# EAGLE board test_out (EAGLE 7.4.0)
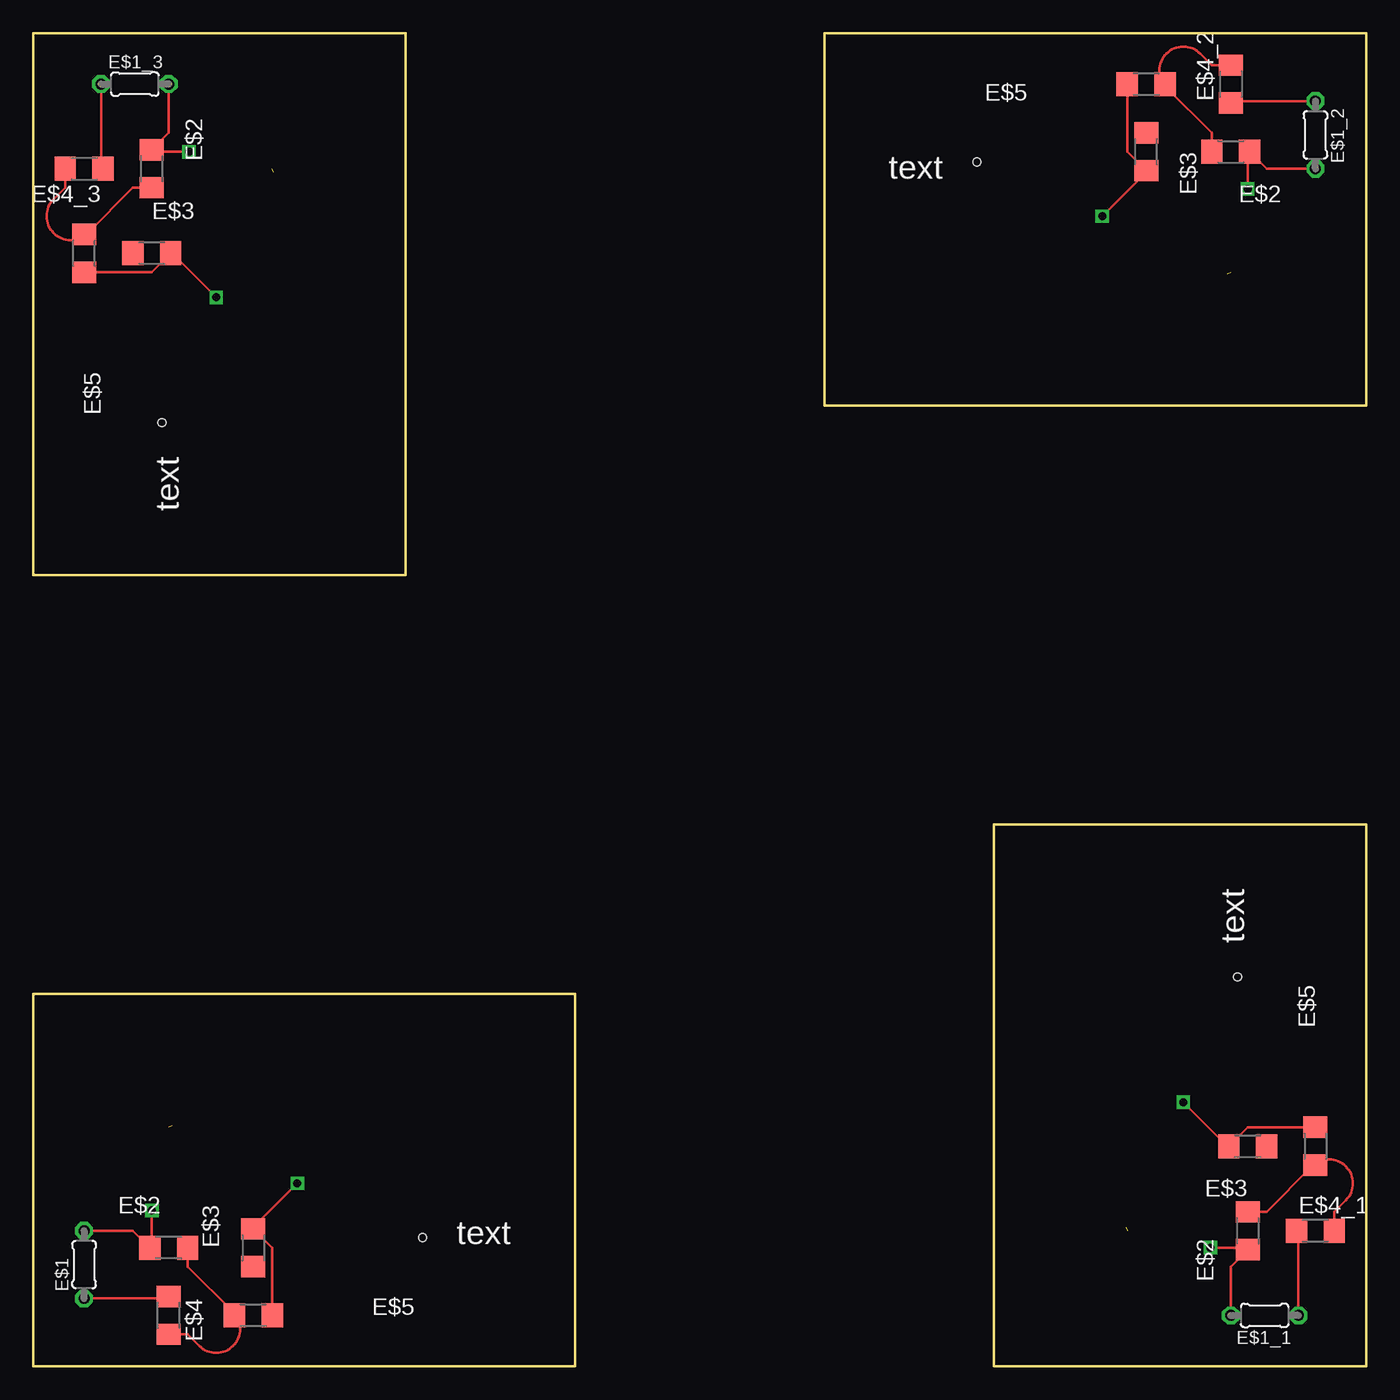
[diagram p0: board, top side]
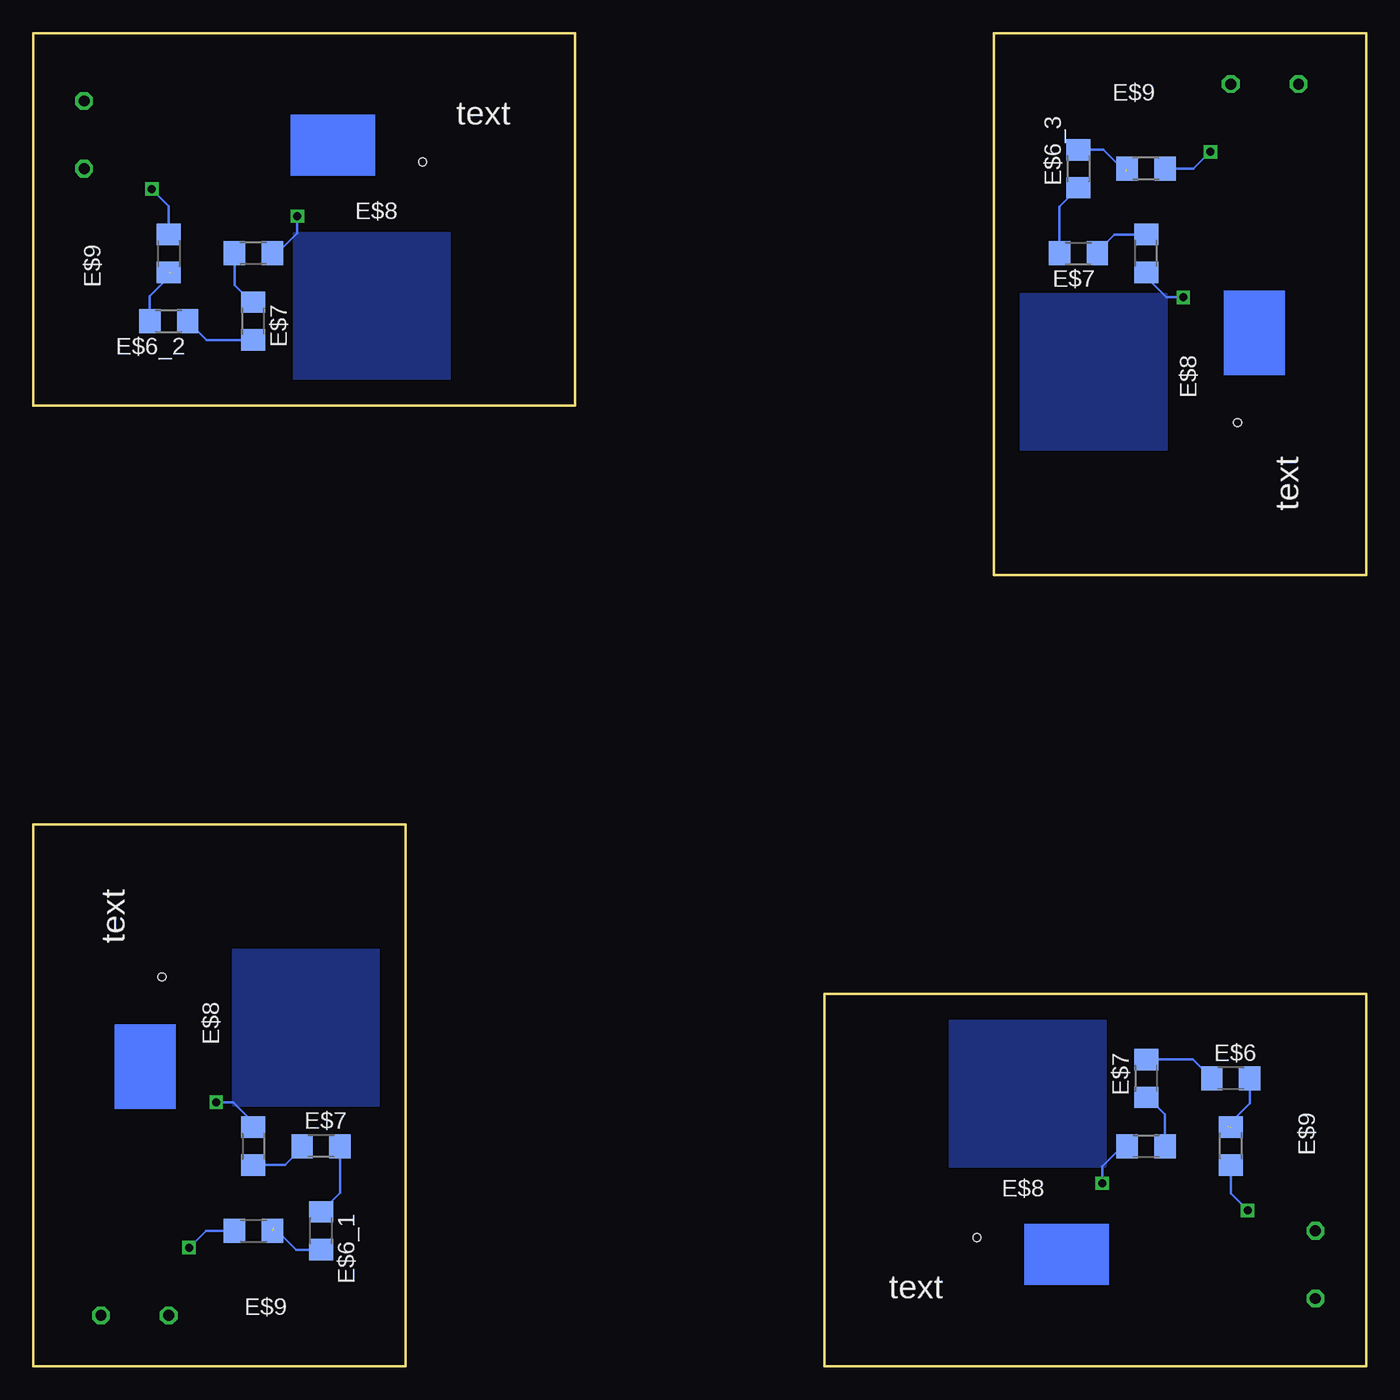
[diagram p1: board, bottom side, seen from below]

Size 100 x 100 mm. Coordinates in mm from the lower left corner, seen from the top.
Outline: 0,0 0,27.94 40.64,27.94 40.64,0 0,0
Outline: 100,0 72.06,0 72.06,40.64 100,40.64 100,0
Outline: 100,100 100,72.06 59.36,72.06 59.36,100 100,100
Outline: 0,100 27.94,100 27.94,59.36 0,59.36 0,100
Copper layers (1*16): Top 0.035mm / dielectric 1.5mm / Bottom 0.035mm
Design rules "default": minimum track width 10mil, minimum drill 24mil, track to track 8mil, track to pad 8mil, pad to pad 8mil, via to via 8mil, smd to smd 8mil, copper to edge 40mil, drill to drill 8mil, minimum pad ring 10mil, minimum via ring 8mil, stop-mask expansion 4mil, vias tented up to drill 0mil, thermal gap 10mil
Holes 0.6 mm at 29.21,9.65 90.35,29.21 70.79,90.35 9.65,70.79

## Footprints (pad centres in the part's own frame; a part is rotated, then mirrored left to right if it is on the bottom)
0204/5 = drill 0.813 octagon: 1 -2.54,0; 2 2.54,0
R1206 = smd 1.6 x 1.803: 1 -1.422,0; 2 1.422,0

## Placement (x,y rotation side)
E$1  [0204/5]  3.81,7.62 90 top
E$1_1  [0204/5]  92.38,3.81 180 top
E$1_2  [0204/5]  96.19,92.38 270 top
E$1_3  [0204/5]  7.62,96.19 0 top
E$2  [R1206]  10.16,8.89 0 top
E$2_1  [R1206]  91.11,10.16 90 top
E$2_2  [R1206]  89.84,91.11 180 top
E$2_3  [R1206]  8.89,89.84 270 top
E$3  [R1206]  16.51,8.89 90 top
E$3_1  [R1206]  91.11,16.51 180 top
E$3_2  [R1206]  83.49,91.11 270 top
E$3_3  [R1206]  8.89,83.49 0 top
E$4  [R1206]  10.16,3.81 270 top
E$4_1  [R1206]  96.19,10.16 0 top
E$4_2  [R1206]  89.84,96.19 90 top
E$4_3  [R1206]  3.81,89.84 180 top
E$5  [R1206]  16.51,3.81 0 top
E$5_1  [R1206]  96.19,16.51 90 top
E$5_2  [R1206]  83.49,96.19 180 top
E$5_3  [R1206]  3.81,83.49 270 top
E$6  [R1206]  10.16,21.59 0 bottom
E$6_1  [R1206]  78.41,10.16 270 bottom
E$6_2  [R1206]  89.84,78.41 180 bottom
E$6_3  [R1206]  21.59,89.84 90 bottom
E$7  [R1206]  16.51,21.59 90 bottom
E$7_1  [R1206]  78.41,16.51 0 bottom
E$7_2  [R1206]  83.49,78.41 270 bottom
E$7_3  [R1206]  21.59,83.49 180 bottom
E$8  [R1206]  16.51,16.51 180 bottom
E$8_1  [R1206]  83.49,16.51 90 bottom
E$8_2  [R1206]  83.49,83.49 0 bottom
E$8_3  [R1206]  16.51,83.49 270 bottom
E$9  [R1206]  10.16,16.51 270 bottom
E$9_1  [R1206]  83.49,10.16 180 bottom
E$9_2  [R1206]  89.84,83.49 90 bottom
E$9_3  [R1206]  16.51,89.84 0 bottom

## Library data of the parts
E$1 E$1_1-E$1_3 E$2-E$4 E$4_1-E$4_3 E$5 E$6 E$6_1-E$6_3 E$7-E$9 = rcl
E$2_1-E$2_3 = rcl; NAME1: E$2
E$3_1-E$3_3 = rcl; NAME1: E$3
E$5_1-E$5_3 = rcl; NAME1: E$5
E$7_1-E$7_3 = rcl; NAME1: E$7
E$8_1-E$8_3 = rcl; NAME1: E$8
E$9_1-E$9_3 = rcl; NAME1: E$9

## Nets
S$1: E$1.1 E$4.1
S$2: E$2.2 E$4.2 E$5.1
S$3: E$3.2 E$5.2 E$8.2
S$4: E$7.1 E$8.1
S$5: E$6.1 E$7.2
S$6: E$6.2 E$9.1
S$7: E$1.2 E$2.1 E$9.2
S$11: E$1_1.1 E$4_1.1
S$12: E$1_2.1 E$4_2.1
S$13: E$1_3.1 E$4_3.1
S$21: E$2_1.2 E$4_1.2 E$5_1.1
S$22: E$2_2.2 E$4_2.2 E$5_2.1
S$23: E$2_3.2 E$4_3.2 E$5_3.1
S$31: E$3_1.2 E$5_1.2 E$8_1.2
S$32: E$3_2.2 E$5_2.2 E$8_2.2
S$33: E$3_3.2 E$5_3.2 E$8_3.2
S$41: E$7_1.1 E$8_1.1
S$42: E$7_2.1 E$8_2.1
S$43: E$7_3.1 E$8_3.1
S$51: E$6_1.1 E$7_1.2
S$52: E$6_2.1 E$7_2.2
S$53: E$6_3.1 E$7_3.2
S$61: E$6_1.2 E$9_1.1
S$62: E$6_2.2 E$9_2.1
S$63: E$6_3.2 E$9_3.1
S$71: E$1_1.2 E$2_1.1 E$9_1.2
S$72: E$1_2.2 E$2_2.1 E$9_2.2
S$73: E$1_3.2 E$2_3.1 E$9_3.2

## Tracks (layer width: path | path; a pad name or v marks a point on that pad's centre or on a via)
S$1
  Top 0.203: E$1.1 9.65,5.08 9.91,5.33 10.06,5.33 E$4.1
S$2
  Top 0.203: E$4.2 11.58,2.39 12.45,1.52 arc180 14.99,4.06 | 14.99,4.06 arc314 E$5.1 | E$2.2 11.58,7.47 14.99,4.06
S$3  (via drill 0.6)
  Top 0.203: E$5.2 17.93,8.89 E$3.2 16.51,10.41 v19.81,13.72
  Bottom 0.203: v19.81,13.72 19.81,14.99 18.03,16.76 18.03,16.61 E$8.2
  pour Bottom: 19.56,14.99 31.24,14.99 31.24,25.91 19.56,25.91
S$4
  Bottom 0.203: E$8.1 15.09,18.9 16.51,20.32 | 16.51,20.32 16.76,20.32 16.51,20.07 E$7.1 16.51,20.32
S$5
  Bottom 0.203: E$7.2 13,23.01 E$6.1
S$6  (1 unrouted)
  Bottom 0.203: E$6.2 8.74,19.71 10.41,18.03
S$7  (via drill 0.6)
  Top 0.203: v8.89,11.68 8.89,8.74 | 8.89,8.64 8.89,8.74 | 8.89,8.74 E$2.1 7.47,10.16 E$1.2
  Bottom 0.203: E$9.2 10.16,12.95 v8.89,11.68
S$11
  Top 0.203: E$1_1.1 94.92,9.65 94.67,9.91 94.67,10.06 E$4_1.1
S$12
  Top 0.203: E$1_2.1 90.35,94.92 90.09,94.67 89.94,94.67 E$4_2.1
S$13
  Top 0.203: E$1_3.1 5.08,90.35 5.33,90.09 5.33,89.94 E$4_3.1
S$21
  Top 0.203: E$4_1.2 97.61,11.58 98.48,12.45 arc180 95.94,14.99 | 95.94,14.99 arc314 E$5_1.1 | E$2_1.2 92.53,11.58 95.94,14.99
S$22
  Top 0.203: E$4_2.2 88.42,97.61 87.55,98.48 arc180 85.01,95.94 | 85.01,95.94 arc314 E$5_2.1 | E$2_2.2 88.42,92.53 85.01,95.94
S$23
  Top 0.203: E$4_3.2 2.39,88.42 1.52,87.55 arc180 4.06,85.01 | 4.06,85.01 arc314 E$5_3.1 | E$2_3.2 7.47,88.42 4.06,85.01
S$31  (via drill 0.6)
  Top 0.203: E$5_1.2 91.11,17.93 E$3_1.2 89.59,16.51 v86.28,19.81
  Bottom 0.203: v86.28,19.81 85.01,19.81 83.24,18.03 83.39,18.03 E$8_1.2
  pour Bottom: 85.01,19.56 85.01,31.24 74.09,31.24 74.09,19.56
S$32  (via drill 0.6)
  Top 0.203: E$5_2.2 82.07,91.11 E$3_2.2 83.49,89.59 v80.19,86.28
  Bottom 0.203: v80.19,86.28 80.19,85.01 81.97,83.24 81.97,83.39 E$8_2.2
  pour Bottom: 80.44,85.01 68.76,85.01 68.76,74.09 80.44,74.09
S$33  (via drill 0.6)
  Top 0.203: E$5_3.2 8.89,82.07 E$3_3.2 10.41,83.49 v13.72,80.19
  Bottom 0.203: v13.72,80.19 14.99,80.19 16.76,81.97 16.61,81.97 E$8_3.2
  pour Bottom: 14.99,80.44 14.99,68.76 25.91,68.76 25.91,80.44
S$41
  Bottom 0.203: E$8_1.1 81.1,15.09 79.68,16.51 | 79.68,16.51 79.68,16.76 79.93,16.51 E$7_1.1 79.68,16.51
S$42
  Bottom 0.203: E$8_2.1 84.91,81.1 83.49,79.68 | 83.49,79.68 83.24,79.68 83.49,79.93 E$7_2.1 83.49,79.68
S$43
  Bottom 0.203: E$8_3.1 18.9,84.91 20.32,83.49 | 20.32,83.49 20.32,83.24 20.07,83.49 E$7_3.1 20.32,83.49
S$51
  Bottom 0.203: E$7_1.2 76.99,13 E$6_1.1
S$52
  Bottom 0.203: E$7_2.2 87,76.99 E$6_2.1
S$53
  Bottom 0.203: E$7_3.2 23.01,87 E$6_3.1
S$61  (1 unrouted)
  Bottom 0.203: E$6_1.2 80.29,8.74 81.97,10.41
S$62  (1 unrouted)
  Bottom 0.203: E$6_2.2 91.26,80.29 89.59,81.97
S$63  (1 unrouted)
  Bottom 0.203: E$6_3.2 19.71,91.26 18.03,89.59
S$71  (via drill 0.6)
  Top 0.203: v88.32,8.89 91.26,8.89 | 91.36,8.89 91.26,8.89 | 91.26,8.89 E$2_1.1 89.84,7.47 E$1_1.2
  Bottom 0.203: E$9_1.2 87.05,10.16 v88.32,8.89
S$72  (via drill 0.6)
  Top 0.203: v91.11,88.32 91.11,91.26 | 91.11,91.36 91.11,91.26 | 91.11,91.26 E$2_2.1 92.53,89.84 E$1_2.2
  Bottom 0.203: E$9_2.2 89.84,87.05 v91.11,88.32
S$73  (via drill 0.6)
  Top 0.203: v11.68,91.11 8.74,91.11 | 8.64,91.11 8.74,91.11 | 8.74,91.11 E$2_3.1 10.16,92.53 E$1_3.2
  Bottom 0.203: E$9_3.2 12.95,89.84 v11.68,91.11
(copper drawn outside any net)
  shapes: Bottom area x4

## Text on the board
tPlace: text | text | text | text
bPlace: text | text | text | text